# Altium PCB rascal-1.2.pcbdoc (part 1 of 3)
Units mm, origin at the board's own origin, x right, y up, seen from the top; angles counter-clockwise.
Board outline 114.3 x 53.34 mm, 4 copper layers (Top Layer, Ground Plane, Power Plane, Bottom Layer); 125 components, 215 nets, 799 pads, 468 vias.
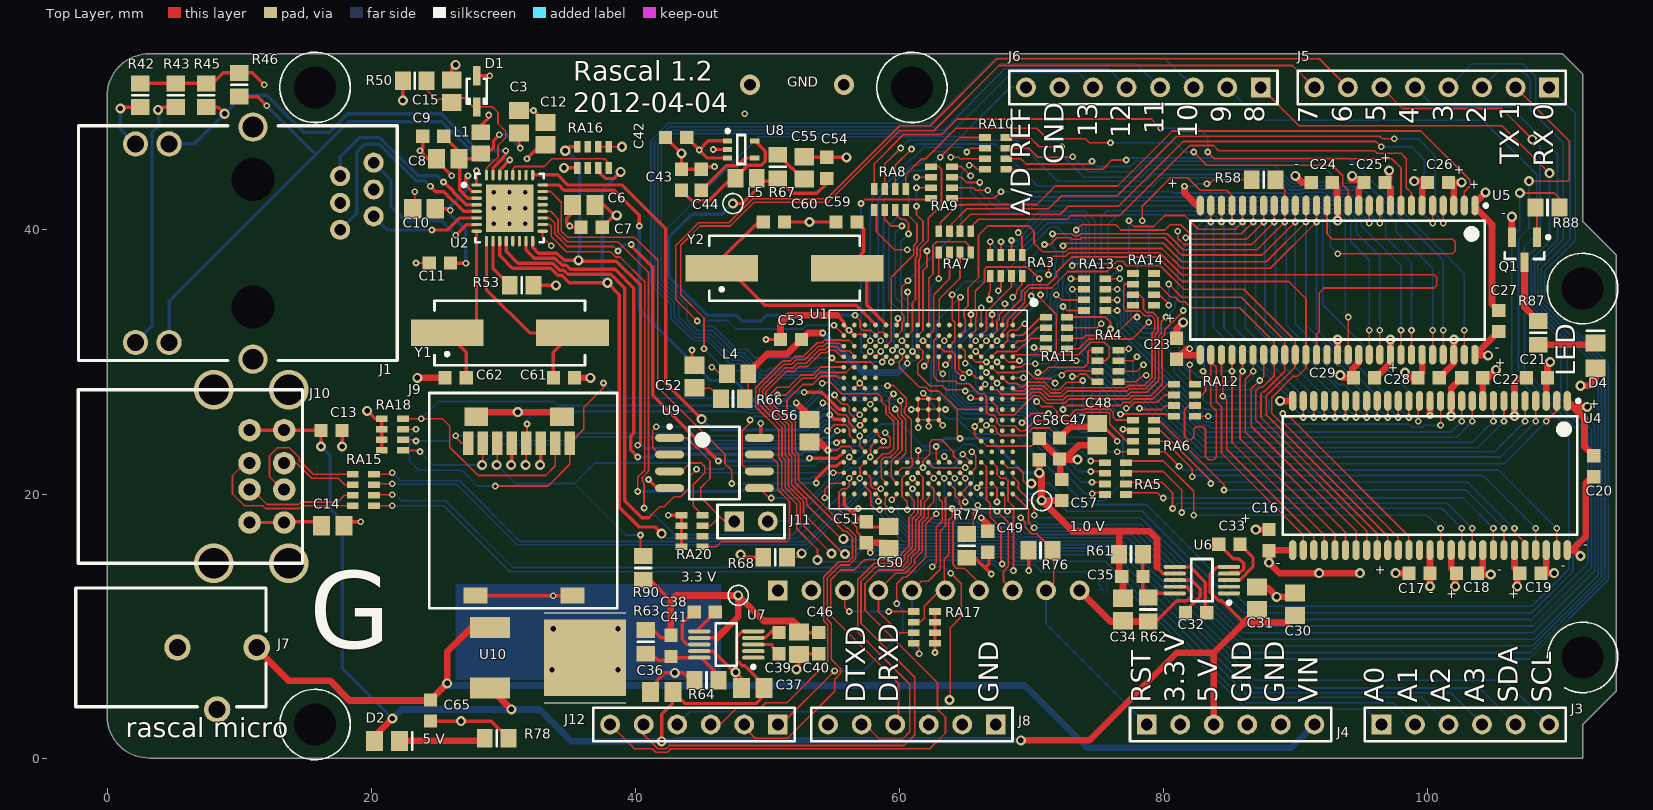
[diagram p0: Top Layer view]
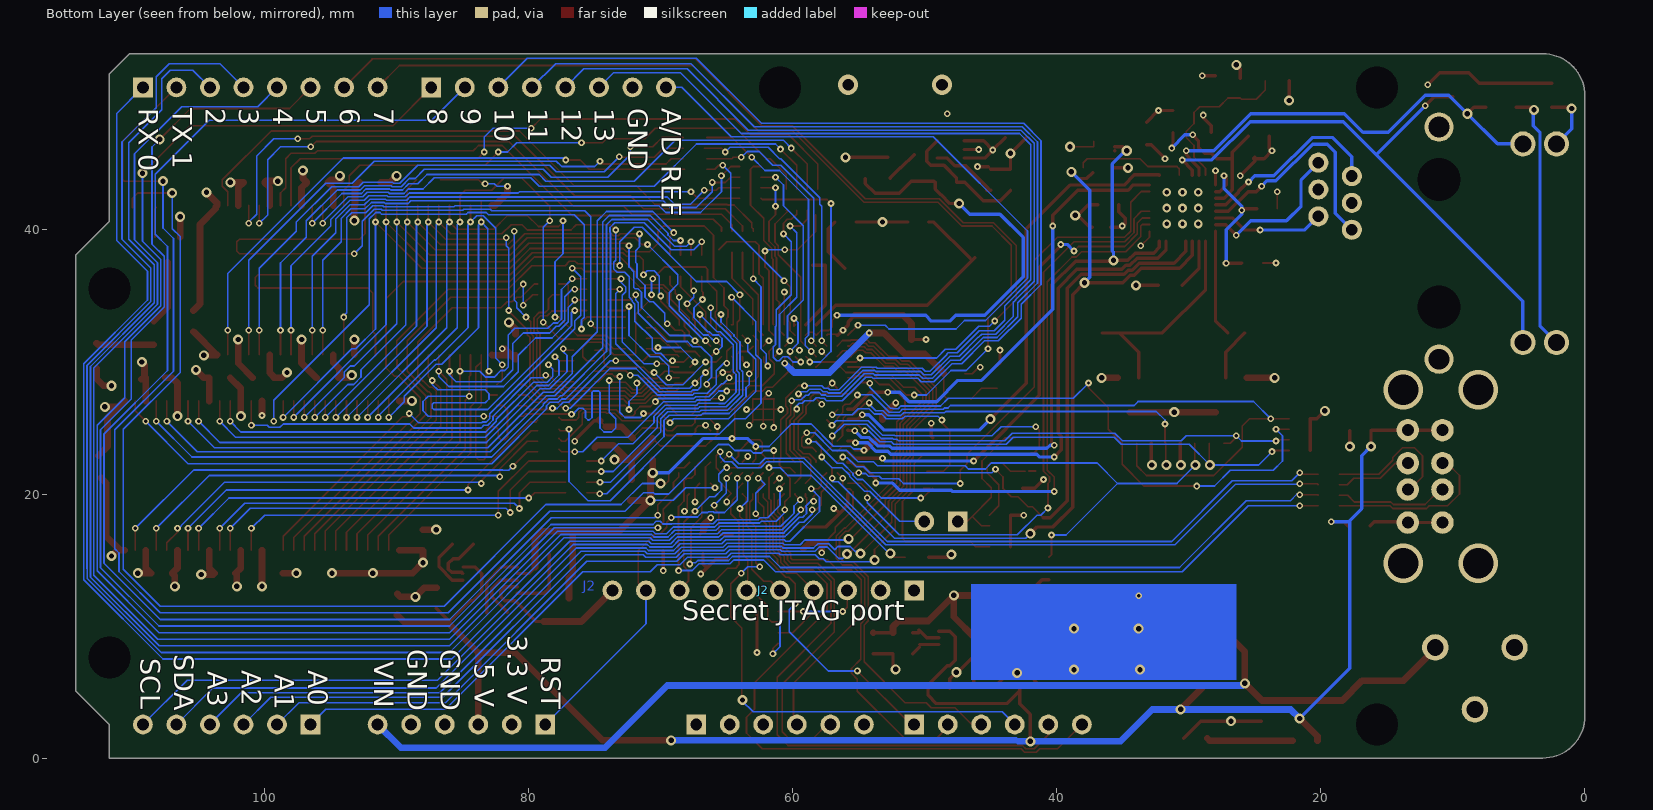
[diagram p1: Bottom Layer view, seen from below]
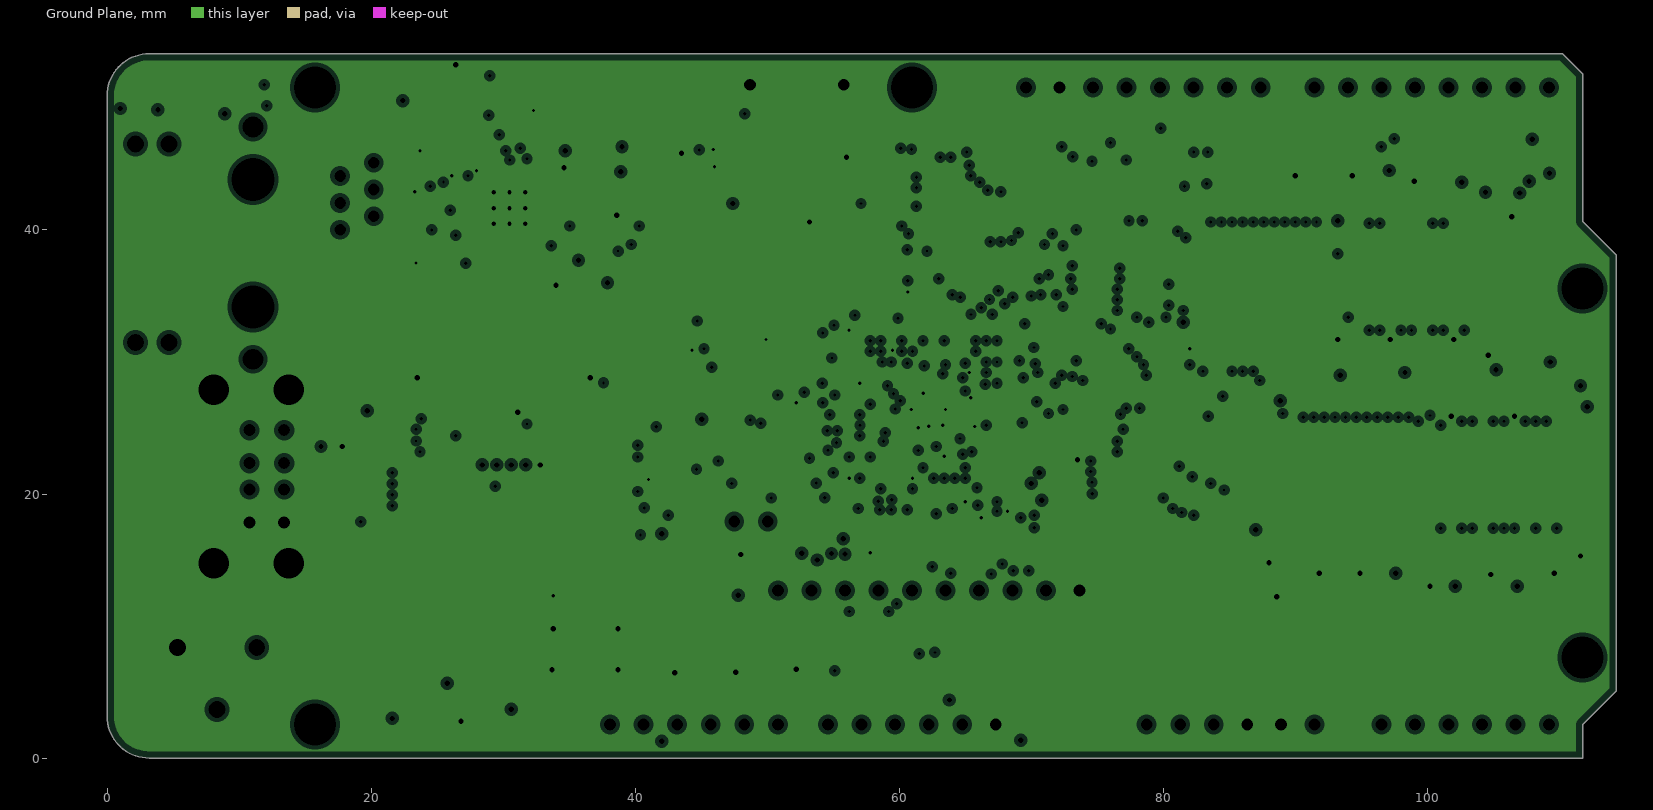
[diagram p2: Ground Plane, clearances drawn from the general rule]
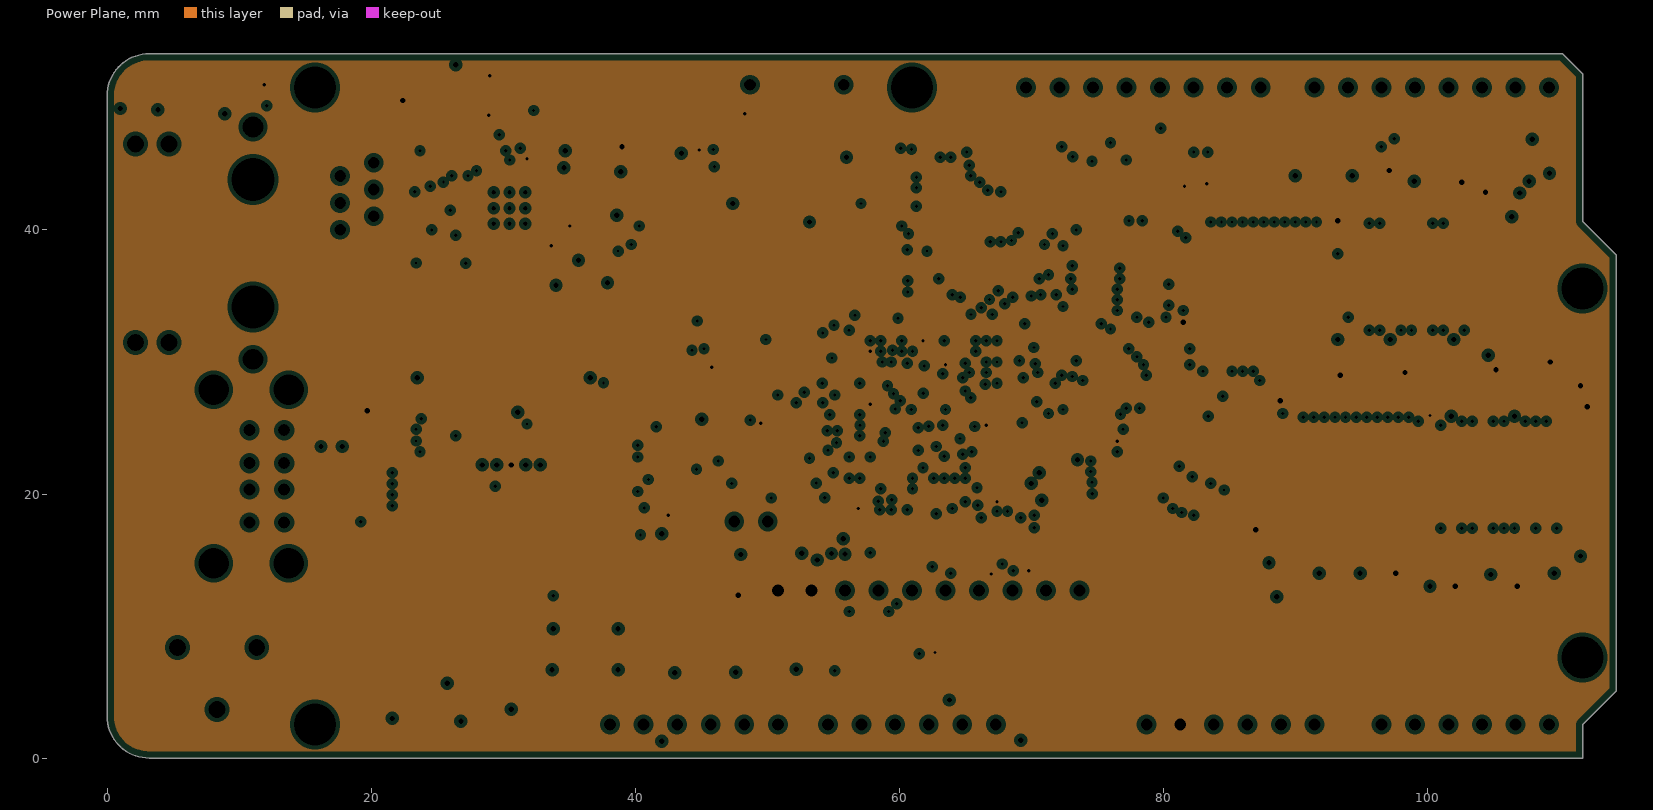
[diagram p3: Power Plane, clearances drawn from the general rule]

## Layer stack, top to bottom
Top Layer: signal copper 0.0356
Dielectric: core 0.32, FR-4, Dk 4.8
Ground Plane: plane copper 0.0356, net GND
Dielectric: prepreg 0.32, FR-4, Dk 4.8
Power Plane: plane copper 0.0356, net 3V3
Dielectric: core 0.32, FR-4, Dk 4.8
Bottom Layer: signal copper 0.0356

## Board outline
0,3.175 ccw(c3.175,3.175) 3.175,0 111.76,0 111.76,2.54 114.3,5.08 114.3,38.1 111.76,40.64 111.76,51.816 110.236,53.34 3.175,53.34 3.175,53.341 ccw(c3.175,50.166) 0,50.166

## Design rules (kind name [scope] priority, off if disabled: settings)
AssemblyTestPointUsage [All] p1: valid=2
AssemblyTestpoint [All] p1: testpointundercomponent=TRUE minsize=1.016 maxsize=2.54 preferedsize=1.524 minholesize=0 maxholesize=1.016 preferedholesize=0.813 testpointgrid=0.025 usegrid=FALSE gridtolerance=0 allowsidetop=TRUE allowsidebottom=TRUE
Clearance no-xtalk-for-memory [(InNetClass('Memory-signals')) vs (InNetClass('Memory-signals'))] p1: gap=0.127 // Preventing crosstalk between memory lines
Clearance "Clearance~Sunstone Circuits" [All] p2: gap=0.127 // Sunstone Circuits Minimum Clearance Rule (MLB~4&6 Layer Designs)
FabricationTestPointUsage [All] p1: valid=2 allowmultiple=FALSE
FabricationTestpoint [All] p1: side=3 testpointundercomponent=TRUE minsize=1.016 maxsize=2.54 preferedsize=1.524 minholesize=0 maxholesize=2.54 preferedholesize=0.813 testpointgrid=0.025 allowsidetop=TRUE allowsidebottom=TRUE usegrid=FALSE gridtolerance=0
HoleSize "HoleSize~Sunstone Circuits" [All] p1: absolutevalues=TRUE maxlimit=6.375 minlimit=0.102 maxpercent=80.000 minpercent=20.000 // Sunstone Circuits Hole Size Rule (MLB~4&6 Layer Designs)
HoleSize Testpoint [All] p2: absolutevalues=TRUE maxlimit=2.54 minlimit=0.025 maxpercent=80.000 minpercent=20.000
HoleSize TestPointUsage [All] p3: absolutevalues=TRUE maxlimit=2.54 minlimit=0.025 maxpercent=80.000 minpercent=20.000
MatchedLengths [InNetClass('U5-signals')] p1: tolerance=1 checknetsindiffpair=TRUE checkdiffpairvsdiffpair=TRUE checkothers=TRUE
MinimumAnnularRing "MinimumAnnularRing~Sunstone Circuits" [All] p1: minimumring=0.127 // Sunstone Circuits Minimum Annular Ring (MLB~4&6 Layer Designs)
MinimumSolderMaskSliver [All] p1: minsoldermaskwidth=0.102
PlaneClearance "PlaneClearance~Sunstone Circuits" [All] p1: clearance=0.305 // Sunstone Circuits Power Plane Clearance Rule (MLB~4&6 Layer Designs)
PlaneConnect "PlaneConnect~Sunstone Circuits" [All] p1: planeconnectstyle=Relief reliefexpansion=0.254 reliefentries=4 reliefconductorwidth=0.203 reliefairgap=0.254 // Sunstone Circuits Power Plane Connect Rule (MLB~4&6 Layer Designs)
PolygonConnect "PolygonConnect~Sunstone Circuits" [All] p1: connectstyle=Relief reliefconductorwidth=0.203 reliefentries=4 polygonreliefangle="90 Angle" // Sunstone Circuits Polygon Connect Style (MLB~4&6 Layer Designs)
RoomDefinition BGARoom [(InComponent('U1'))] p1: confinementstyle=ConfineIn formatcopy=TRUE lockcomponents=FALSE outline 70.9,18.669 54.483,18.669 54.483,35.4 70.9,35.4
RoutingVias "RoutingVias~Sunstone Circuits" [All] p1: holewidth=0.152 width=0.432 viastyle="Through Hole" minholewidth=0.152 minwidth=0.432 maxholewidth=0.508 maxwidth=1.016 // Sunstone Circuits Routing Vias Rule (MLB~4&6 Layer Designs)
ShortCircuit "ShortCircuit~Sunstone Circuits" [All] p1: allowed=FALSE // Sunstone Circuits Short Circuit Rule~Do Not Allow (MLB~4&6 Layer Designs)
SilkscreenOverComponentPads [All] p1: minsilkscreentomaskgap=0.127
SolderMaskExpansion SolderMaskExpansion_ViasUnderBGA [WithinRoom(BGARoom) And (IsVia)] p1: expansion=-0.279
SolderMaskExpansion [All] p2: expansion=0.064 // Sunstone Circuits Solder Mask Expansion Rule (MLB~4&6 Layer Designs)
SupplyNets "Schematic Supply Nets_7" [InNet('VIN')] p1: voltage=9.000
SupplyNets "Schematic Supply Nets_6" [InNet('5VDC')] p2: voltage=5.000
SupplyNets "Schematic Supply Nets_5" [InNet('3V3')] p3: voltage=3.300
SupplyNets "Schematic Supply Nets_4" [InNet('3V3OSC')] p4: voltage=3.300
SupplyNets "Schematic Supply Nets_3" [InNet('NetC3_1')] p5: voltage=3.300
SupplyNets "Schematic Supply Nets_2" [InNet('NetC10_1')] p6: voltage=1.200
SupplyNets "Schematic Supply Nets_1" [InNet('1V0')] p7: voltage=1.000
SupplyNets "Schematic Supply Nets" [InNet('1V0PLL')] p8: voltage=1.000
ViasUnderSMD "ViasUnderSMD~Sunstone Circuits" [All] p1: allowed=FALSE // Sunstone Circuits Vias Under SMD~Do Not Allow (MLB~4&6 Layer Designs)
Width "Width~Sunstone Circuits" [All] p1: maxlimit=2.54 minlimit=0.076 preferedwidth=0.127 // Sunstone Circuits Minimum Width Rule (MLB~4&6 Layer Designs)
18 further rules are at their usual default settings.

## Classes and differential pairs
component class "Room Definition 1": C16 C17 C18 C19 C21 C22 C23 C24 C25 C26 C27 C28 C29 C33 C35 C47 C48 C57 Q1 R58 R61 R87 R88 RA4 RA5 RA6 RA12 RA13 RA14 U4 U5 U6
component class "Components Class 1": C16 C21 C22 C27 C28 C29 C33 Q1 R87
net class Memory-signals: A0 A1 A2 A3 A4 A5 A6 A7 A8 A9 A10 A11 A13 A14 CAS CKE CLK CS D0 D1 D2 D3 D4 D5 D6 D7 D8 D9 D10 D11 D12 D13 D14 D15 D16 D17 D18 D19 D20 D21 D22 D23 D24 D25 D26 D27 D28 D29 D30 D31 DQMH1 DQMH2 NetRA3_1 NetRA3_2 NetRA3_3 NetRA3_4 NetRA4_1 NetRA4_2 NetRA4_3 NetRA4_4 NetRA5_1 NetRA5_2 NetRA5_3 NetRA5_4 NetRA6_1 NetRA6_2 NetRA6_3 NetRA6_4 NetRA7_1 NetRA7_2 NetRA7_3 NetRA7_4 NetRA8_1 NetRA8_2 NetRA8_3 NetRA8_4 NetRA9_1 NetRA9_2 NetRA9_3 NetRA9_4 NetRA10_1 NetRA10_2 NetRA10_3 NetRA10_4 NetRA11_1 NetRA11_2 NetRA11_3 NetRA11_4 NetRA12_1 NetRA12_2 NetRA12_3 NetRA12_4 NetRA13_1 NetRA13_2 NetRA13_3 NetRA13_4 NetRA14_2 NetRA14_3

## Components (designator, comment, footprint, x,y, rotation, side; value= is the part's Value field where it differs from the comment)
C3 "Cap" CAPC2012N 31.2,48.2 r90 top
C6 "Cap" CAPC2012N 36.1,41.9 r0 top
C7 "Cap" CAPC1608N 36.7,40.2 r0 top
C8 "Cap" CAPC2012N 25.8,45.4 r180 top
C9 "Cap" CAPC1608N 24.7,47.1 r180 top
C10 "Cap" CAPC2012N 24,41.6 r180 top
C11 "Cap" CAPC1608N 25.2,37.5 r180 top
C12 "Cap" CAPC2012N 33.2,47.3 r90 top
C13 "Cap" CAPC1608N 17,24.8 r180 top
C14 "Cap" CAPC2012N 17.1,17.6 r0 top
C15 "Cap" CAPC2012N 26.1,50.5 r90 top
C16 "Cap" CAPC1608N 88,16.5 r270 top
C17 "Cap" CAPC1608N 99.4,14 r0 top
C18 "Cap" CAPC1608N 103,14 r0 top
C19 "Cap" CAPC1608N 107.8,14 r0 top
C20 "Cap" CAPC1608N 112.6,22.1 r270 top
C21 "Cap" CAPC1608N 108.3,28.8 r180 top
C22 "Cap" CAPC1608N 103.4,28.8 r180 top
C23 "Cap" CAPC1608N 81,31 r270 top
C24 "Cap" CAPC1608N 92,43.6 r180 top
C25 "Cap" CAPC1608N 96,43.6 r180 top
C26 "Cap" CAPC1608N 100.8,43.6 r180 top
C27 "Cap" CAPC1608N 105.4,33.1 r270 top
C28 "Cap" CAPC1608N 100.1,28.8 r0 top
C29 "Cap" CAPC1608N 95.2,28.8 r0 top
C30 "Cap" CAPC2012N 89.963,11.649 r90 top
C31 "Cap" CAPC2012N 87.087,12.109 r90 top
C32 "Cap" CAPC1608N 82.487,11.009 r0 top
C33 "Cap" CAPC1608N 85,16.2 r180 top
C34 "Cap" CAPC2012N 76.952,11.248 r270 top
C35 "Cap" CAPC1608N 77.652,13.748 r0 top
C36 "Cap" CAPC2012N 42,5 r180 top
C37 "Cap" CAPC2012N 48.9,5.3 r180 top
C38 "Cap" CAPC1608N 45.267,11.059 r0 top
C39 "Cap" CAPC1608N 50.9,8.7 r90 top
C40 "Cap" CAPC2012N 52.4,8.7 r270 top
C41 "Cap" CAPC1608N 42.7,8.5 r270 top
C42 "Cap" CAPC1608N 43.1,47 r180 top
C43 "Cap" CAPC1608N 43.5,43.8 r90 top
C44 "Cap" CAPC1608N 45,43.8 r90 top
C46 "Cap" CAPC1608N 53.9,8.7 r270 top
C47 "Cap" CAPC1608N 72.131,23.446 r90 top
C48 "Cap" CAPC2012N 75,24.5 r90 top
C49 "Cap" CAPC1608N 66.7,16.385 r270 top
C50 "Cap" CAPC2012N 59.2,16.7 r90 top
C51 "Cap" CAPC1608N 57.5,17.1 r90 top
C52 "Cap" CAPC2012N 44.5,28.9 r270 top
C53 "Cap" CAPC1608N 51.8,31.7 r0 top
C54 "Cap" CAPC1608N 54.5,44.7 r270 top
C55 "Cap" CAPC2012N 52.8,44.7 r270 top
C56 "Cap" CAPC2012N 53.2,24.8 r270 top
C57 "Cap" CAPC1608N 72.3,20.3 r270 top
C58 "Cap" CAPC1608N 70.6,23.4 r270 top
C59 "Cap" CAPC1608N 56,40.6 r0 top
C60 "Cap" CAPC1608N 50.5,40.6 r180 top
C61 "Cap" CAPC1608N 34.6,28.8 r0 top
C62 "Cap" CAPC1608N 26.4,28.8 r180 top
C65 "Cap" CAPC1608N 24.5,3.6 r90 top
D1 "Diode 1N4148" SOD-323 28,50.5 r270 top
D2 "LED2" CD2012-0805 21.2,1.3 r0 top
D4 "LED" CD2012-0805 112.727,30.478 r90 top
J1 "L829-1X1T-91" "BEL L829-1X1T-91" 11.045,39 r90 top locked
J2 "ARM JTAG HEADER" HDR1X10 50.8,12.7 r0 bottom locked
J3 "ARDUINO_ANALOG_IN" HDR1X6 96.52,2.54 r0 top locked
J4 "ARDUINO_SHIELD_POWER" HDR1X6 78.74,2.54 r0 top locked
J5 "ARDUINO_DIGITAL_LOW_BYTE" HDR1X8 109.22,50.8 r180 top locked
J6 "ARDUINO_DIGITAL_HIGH_BYTE" HDR1X8 87.376,50.8 r180 top locked
J7 "Center-positive 2.1 mm power jack" PJ-102AH 11.328,8.382 r90 top locked
J8 "SERIAL DEBUG PORT" HDR1X6 67.31,2.54 r180 top
J9 "MICROSD_SOCKET" "JAE SJ107021" 31.2,12.3 r270 top locked
J10 "72309-8034BLF" 72309-8034BLF -2.2,21.336 r270 top locked
J11 "Serial flash CS enable" HDR1X2 47.498,17.928 r0 top
J12 "SSC PORT" HDR1X6 50.8,2.54 r180 top
L1 "Inductor" INDC2012L 28.3,46.6 r270 top
L4 "Inductor" INDC2012L 47.756,29.1 r0 top
L5 "Inductor" INDC2012L 48.4,43.9 r0 top
Q1 "2N3904" SOT23-3N 107.35,38.5 r270 top
R42 "Res3" RESC2012N 2.5,50.2 r90 top
R43 "Res3" RESC2012N 5.2,50.2 r90 top
R45 "Res3" RESC2012N 7.5,50.2 r90 top
R46 "Res3" RESC2012N 10,51 r90 top
R50 "Res3" RESC2012N 23.3,51.3 r180 top
R53 "Res3" RESC2012N 31.4,35.8 r0 top
R58 "Res3" RESC2012N 87.6,43.8 r0 top
R61 "Res3" RESC2012N 77.552,15.448 r0 top
R62 "Res3" RESC2012N 78.852,11.248 r270 top
R63 "Res3" RESC2012N 40.8,8.8 r270 top
R64 "Res3" RESC2012N 45.4,5.9 r180 top
R66 "Res3" RESC2012N 47.4,27.2 r180 top
R67 "Res3" RESC2012N 50.8,44.8 r90 top
R68 "Res3" RESC2012N 50.6,15.2 r0 top
R76 "Res3" RESC2012N 70.7,15.726 r0 top
R77 "Res3" RESC2012N 65.1,16.067 r90 top
R78 "Res3" RESC2012N 29.5,1.5 r0 top
R87 "Res3" RESC2012N 108.4,32.2 r90 top
R88 "Res3" RESC2012N 109.1,41.7 r180 top
R90 "Res3" RESC2012N 40.6,14.4 r90 top
RA3 "RESISTOR ARRAY" 742C083 68.1,37.3 r0 top
RA4 "RESISTOR ARRAY" 742C083 75.8,29.7 r270 top
RA5 "RESISTOR ARRAY" 742C083 76.384,21.159 r270 top
RA6 "RESISTOR ARRAY" 742C083 78.5,24.4 r270 top
RA7 "RESISTOR ARRAY" 742C083 64.2,39.1 r0 top
RA8 "RESISTOR ARRAY" 742C083 59.3,42.3 r0 top
RA9 "RESISTOR ARRAY" 742C083 63.2,43.6 r270 top
RA10 "RESISTOR ARRAY" 742C083 67.3,45.8 r270 top
RA11 "RESISTOR ARRAY" 742C083 71.9,32.2 r270 top
RA12 "RESISTOR ARRAY" 742C083 81.6,27.1 r270 top
RA13 "RESISTOR ARRAY" 742C083 74.8,35.1 r270 top
RA14 "RESISTOR ARRAY" 742C083 78.5,35.5 r270 top
RA15 "RESISTOR ARRAY" 742C083 19.4,20.3 r270 top
RA16 "RESISTOR ARRAY" 742C083 36.8,45.5 r180 top
RA17 "RESISTOR ARRAY" 742C083 61.9,9.9 r90 top
RA18 "RESISTOR ARRAY" 742C083 21.6,24.5 r270 top
RA20 "RESISTOR ARRAY" 742C083 44.3,17.2 r270 top
U1 "AT91SAM9G20B-CU" AT91SAM9G20-CU 62.2,26.4 r270 top locked
U2 "KSZ8051RNL" QFN50P500X500-32VBN 30.48,41.656 r0 top
U4 "MT48LCxxMxxA2x-xx" TSOP2-54_N 100.2,21.4 r270 top locked
U5 "MT48LCxxMxxA2x-xx" TSOP2-54_N 93.2,36.2 r270 top locked
U6 "TPS60500" TSSOP50P490-10AN 82.925,13.474 r180 top
U7 "TPS60500" TSSOP50P490-10AN 46.9,8.6 r180 top
U8 "TPS717xx" SOT353-5AN 48.022,46.094 r0 top
U9 "MX25L3205D" SOP127P780-8N 46,22.352 r0 top locked
U10 "Volt Reg" DPAK-3 29,7.6 r270 top
Y1 "XTAL" HC49/4H_SMX 30.5,32.2 r0 top
Y2 "18.432 MHz" HC49/4H_SMX 51.3,37.1 r0 top

## Footprints (in the part's own frame and the unit in brackets; to place one, negate y for a bottom-side part, rotate by r counter-clockwise, add the part's x,y. Pads: shape width x height; smd on the part's side, far side on the other; paste and mask are expansions set on the pad)
742C083 [mm] "Resistor array"
  rect 0.5x0.9 smd mask+0.025: 1(-1.2,-0.8) 2(-0.4,-0.8) 3(0.4,-0.8) 4(1.2,-0.8) 5(1.2,0.8) 6(0.4,0.8) 7(-0.4,0.8) 8(-1.2,0.8)
72309-8034BLF [mm] "USB doubler decker jack"
  round 1.7 hole 0.92: 1(-3.5,15.61) 2(-1,15.61) 3(1,15.61) 4(3.5,15.61) 5(-3.5,12.99) 6(-1,12.99) 7(1,12.99) 8(3.5,12.99)
  silkscreen extent -6.57,0 6.57,17, body extent -6.5,0 6.5,17, height 15.5
AT91SAM9G20-CU [mil] "217-ball, 15 x 15 mm LFBGA package, 0.8 mm pitch"
  round 14 smd mask-1.09: A1(-251.97,251.97) A2(-220.47,251.97) A3(-188.98,251.97) A4(-157.48,251.97) A5(-125.98,251.97) A6(-94.49,251.97) A7(-62.99,251.97) A8(-31.5,251.97) A9(0,251.97) A10(31.5,251.97) A11(62.99,251.97) A12(94.49,251.97) A13(125.98,251.97) A14(157.48,251.97) A15(188.98,251.97) A16(220.47,251.97) A17(251.97,251.97) B1(-251.97,220.47) B2(-220.47,220.47) B3(-188.98,220.47) B4(-157.48,220.47) B5(-125.98,220.47) B6(-94.49,220.47) B7(-62.99,220.47) B8(-31.5,220.47) B9(0,220.47) B10(31.5,220.47) B11(62.99,220.47) B12(94.49,220.47) B13(125.98,220.47) B14(157.48,220.47) B15(188.98,220.47) B16(220.47,220.47) B17(251.97,220.47) C1(-251.97,188.98) C2(-220.47,188.98) C3(-188.98,188.98) C4(-157.48,188.98) C5(-125.98,188.98) C6(-94.49,188.98) C7(-62.99,188.98) C8(-31.5,188.98) C9(0,188.98) C10(31.5,188.98) C11(62.99,188.98) C12(94.49,188.98) C13(125.98,188.98) C14(157.48,188.98) C15(188.98,188.98) C16(220.47,188.98) C17(251.97,188.98) D1(-251.97,157.48) D2(-220.47,157.48) D3(-188.98,157.48) D4(-157.48,157.48) D5(-125.98,157.48) D6(-94.49,157.48) D7(-62.99,157.48) D8(-31.5,157.48) D9(0,157.48) D10(31.5,157.48) D11(62.99,157.48) D12(94.49,157.48) D13(125.98,157.48) D14(157.48,157.48) D15(188.98,157.48) D16(220.47,157.48) D17(251.97,157.48) E1(-251.97,125.98) E2(-220.47,125.98) E3(-188.98,125.98) E4(-157.48,125.98) E14(157.48,125.98) E15(188.98,125.98) E16(220.47,125.98) E17(251.97,125.98) F1(-251.97,94.49) F2(-220.47,94.49) F3(-188.98,94.49) F4(-157.48,94.49) F14(157.48,94.49) F15(188.98,94.49) F16(220.47,94.49) F17(251.97,94.49) G1(-251.97,62.99) G2(-220.47,62.99) G3(-188.98,62.99) G4(-157.48,62.99) G14(157.48,62.99) G15(188.98,62.99) G16(220.47,62.99) G17(251.97,62.99) H1(-251.97,31.5) H2(-220.47,31.5) H3(-188.98,31.5) H4(-157.48,31.5) H8(-31.5,31.5) H9(0,31.5) H10(31.5,31.5) H14(157.48,31.5) H15(188.98,31.5) H16(220.47,31.5) H17(251.97,31.5) J1(-251.97,0) J2(-220.47,0) J3(-188.98,0) J4(-157.48,0) J8(-31.5,0) J9(0,0) J10(31.5,0) J14(157.48,0) J15(188.98,0) J16(220.47,0) J17(251.97,0) K1(-251.97,-31.5) K2(-220.47,-31.5) K3(-188.98,-31.5) K4(-157.48,-31.5) K8(-31.5,-31.5) K9(0,-31.5) K10(31.5,-31.5) K14(157.48,-31.5) K15(188.98,-31.5) K16(220.47,-31.5) K17(251.97,-31.5) L1(-251.97,-62.99) L2(-220.47,-62.99) L3(-188.98,-62.99) L4(-157.48,-62.99) L14(157.48,-62.99) L15(188.98,-62.99) L16(220.47,-62.99) L17(251.97,-62.99) M1(-251.97,-94.49) M2(-220.47,-94.49) M3(-188.98,-94.49) M4(-157.48,-94.49) M14(157.48,-94.49) M15(188.98,-94.49) M16(220.47,-94.49) M17(251.97,-94.49) N1(-251.97,-125.98) N2(-220.47,-125.98) N3(-188.98,-125.98) N4(-157.48,-125.98) N14(157.48,-125.98) N15(188.98,-125.98) N16(220.47,-125.98) N17(251.97,-125.98) P1(-251.97,-157.48) P2(-220.47,-157.48) P3(-188.98,-157.48) P4(-157.48,-157.48) P5(-125.98,-157.48) P6(-94.49,-157.48) P7(-62.99,-157.48) P8(-31.5,-157.48) P9(0,-157.48) P10(31.5,-157.48) P11(62.99,-157.48) P12(94.49,-157.48) P13(125.98,-157.48) P14(157.48,-157.48) P15(188.98,-157.48) P16(220.47,-157.48) P17(251.97,-157.48) R1(-251.97,-188.98) R2(-220.47,-188.98) R3(-188.98,-188.98) R4(-157.48,-188.98) R5(-125.98,-188.98) R6(-94.49,-188.98) R7(-62.99,-188.98) R8(-31.5,-188.98) R9(0,-188.98) R10(31.5,-188.98) R11(62.99,-188.98) R12(94.49,-188.98) R13(125.98,-188.98) R14(157.48,-188.98) R15(188.98,-188.98) R16(220.47,-188.98) R17(251.97,-188.98) T1(-251.97,-220.47) T2(-220.47,-220.47) T3(-188.98,-220.47) T4(-157.48,-220.47) T5(-125.98,-220.47) T6(-94.49,-220.47) T7(-62.99,-220.47) T8(-31.5,-220.47) T9(0,-220.47) T10(31.5,-220.47) T11(62.99,-220.47) T12(94.49,-220.47) T13(125.98,-220.47) T14(157.48,-220.47) T15(188.98,-220.47) T16(220.47,-220.47) T17(251.97,-220.47) U1(-251.97,-251.97) U2(-220.47,-251.97) U3(-188.98,-251.97) U4(-157.48,-251.97) U5(-125.98,-251.97) U6(-94.49,-251.97) U7(-62.99,-251.97) U8(-31.5,-251.97) U9(0,-251.97) U10(31.5,-251.97) U11(62.99,-251.97) U12(94.49,-251.97) U13(125.98,-251.97) U14(157.48,-251.97) U15(188.98,-251.97) U16(220.47,-251.97) U17(251.97,-251.97)
  silkscreen extent -323,-295 295,319, body extent -299,-299 299,299, height 55
"BEL L829-1X1T-91" [mil] "Bel L829-1X1T-91 RJ45 jack"
  round 60 hole 128: 0(190,0) 1(-190,0)
  round 87 hole 62: 2(346,0) 3(-346,0)
  round 60 hole 35: 4(40,-260) 5(120,-260) 6(200,-260) 10(80,-360) 11(160,-360) 12(240,-360)
  round 75 hole 50: 13(-296,250) 14(-296,350) 15(296,250) 16(296,350)
  silkscreen extent -350,-430 350,520, body extent -350,-435 350,525, height 453
CAPC1608N [mm] "Chip Capacitor, Body 1.6x0.8mm, IPC Medium Density"
  rect 1x1 smd: 1(-0.8,0) 2(0.8,0)
  body extent -0.87,-0.48 0.87,0.48, height 0.85
CAPC2012N [mm] "Chip Capacitor, Body 2.0x1.3mm, IPC Medium Density"
  rect 1.3x1.5 smd: 1(-0.85,0) 2(0.85,0)
  body extent -1.1,-0.72 1.1,0.72, height 1.1
CD2012-0805 [mm] "Chip Diode; Body 2.0 x 1.3 mm (LxW typ)"
  rect 1.3x1.5 smd: 1(-0.95,0) 2(0.95,0)
  silkscreen extent 1.9,-0.65 1.9,0.65
DPAK-3 [mm] "Case 369C-01 for MC78xx regulators"
  rect 1.6x3 smd: 1(-2.3,0) 3(2.3,0)
  rect 5.8x6.2 smd: 2(0,7.2)
  silkscreen extent -3.4,4.1 3.4,10.3, body extent -3.4,4.1 3.4,10.3, height 2.38
HC49/4H_SMX [mm] "Quartz Crystal, SM; Body 13.4 (inc. leads) x 4.9 mm (LxW max)"
  rect 5.5x2 smd: 1(-4.75,0) 2(4.75,0)
  silkscreen extent -5.7,-2.45 5.7,2.45
HDR1X2 [mm] "Connector; Header; 2 Position"
  rect 1.5x1.5 hole 0.9: 1(0,0)
  round 1.5 hole 0.9: 2(2.54,0)
  silkscreen extent -1.27,-1.27 3.81,1.27
HDR1X6 [mm]
  rect 1.5x1.5 hole 0.9: 1(0,0)
  round 1.5 hole 0.9: 2(2.54,0) 3(5.08,0) 4(7.62,0) 5(10.16,0) 6(12.7,0)
  silkscreen extent -1.27,-1.27 13.97,1.27, body extent -1.28,-1.27 13.98,1.26, height 8.5
HDR1X8 [mm]
  rect 1.5x1.5 hole 0.9: 1(0,0)
  round 1.5 hole 0.9: 2(2.54,0) 3(5.08,0) 4(7.62,0) 5(10.16,0) 6(12.7,0) 7(15.24,0) 8(17.78,0)
  silkscreen extent -1.27,-1.27 19.05,1.27, body extent -1.3,-1.3 19.04,1.25, height 8.5
HDR1X10 [mm] "Connector; Header; 10 Position"
  rect 1.5x1.5 hole 0.9: 1(0,0)
  round 1.5 hole 0.9: 2(2.54,0) 3(5.08,0) 4(7.62,0) 5(10.16,0) 6(12.7,0) 7(15.24,0) 8(17.78,0) 9(20.32,0) 10(22.86,0)
INDC2012L [mm] "Chip Inductor, Body 2.0x1.2mm, IPC High Density"
  rect 1.2x1.4 smd: 1(-0.8,0) 2(0.8,0)
  body extent -1.1,-0.7 1.1,0.7, height 0.55
"JAE SJ107021" [mm] "MicroSD card socket"
  rect 1.8x0.8 smd: 1(-11.55,-3.85) 2(-11.55,-2.75) 3(-11.55,-1.65) 4(-11.55,-0.55) 5(-11.55,0.55) 6(-11.55,1.65) 7(-11.55,2.75) 8(-11.55,3.85)
  rect 1.2x1.8 smd: 9(0,-3.3) 10(0,4.05)
  rect 1.4x1.8 smd: 11(-13.55,-3.25) 12(-13.55,3.25)
  silkscreen extent -15.35,-6.8 0.95,7.45, body extent -15.25,-6.75 1,7.5, height 2
PJ-102AH [mm] "Center positive 2.1 mm power jack"
  round 2 hole 1.27: 1(0,0) 2(0,6) 3(-4.7,3)
  silkscreen extent -4.5,-0.7 4.5,13.7, body extent -5.8,-0.7 4.5,13.7, height 11
QFN50P500X500-32VBN [mm] "32-Pin Plastic Quad Flat No-Lead 0.5 mm Pitch"
  oval 0.8x0.25 smd: 1(-2.5,1.75) 2(-2.5,1.25) 3(-2.5,0.75) 4(-2.5,0.25) 5(-2.5,-0.25) 6(-2.5,-0.75) 7(-2.5,-1.25) 8(-2.5,-1.75) 17(2.5,-1.75) 18(2.5,-1.25) 19(2.5,-0.75) 20(2.5,-0.25) 21(2.5,0.25) 22(2.5,0.75) 23(2.5,1.25) 24(2.5,1.75)
  oval 0.25x0.8 smd: 9(-1.75,-2.5) 10(-1.25,-2.5) 11(-0.75,-2.5) 12(-0.25,-2.5) 13(0.25,-2.5) 14(0.75,-2.5) 15(1.25,-2.5) 16(1.75,-2.5) 25(1.75,2.5) 26(1.25,2.5) 27(0.75,2.5) 28(0.25,2.5) 29(-0.25,2.5) 30(-0.75,2.5) 31(-1.25,2.5) 32(-1.75,2.5)
  rect 3.6x3.6 smd: 33(0,0)
  silkscreen extent -3.57,-2.6 2.6,2.6, body extent -2.58,-2.58 2.58,2.58, height 1
RESC2012N [mm] "Chip Resistor, Body 2.0x1.2mm, IPC Medium Density"
  rect 1.2x1.4 smd: 1(-0.9,0) 2(0.9,0)
  silkscreen extent 0,-0.6 0,0.6, body extent -1.07,-0.7 1.07,0.7, height 0.7
SOD-323 [mm] "SOD-323/SC-76; 2 Leads; Body 1.7 x 1.3 mm, (LxW)"
  rect 1.45x0.55 smd: 1(1.175,0) 2(-1.175,0)
  silkscreen extent -0.95,-0.75 0.95,0.75
SOP127P780-8N [mm] "SOP, 8-Leads, Body 5.3x5.3mm, Pitch 1.27mm, IPC Medium Density"
  oval 2.2x0.6 smd: 1(-3.4,1.905) 2(-3.4,0.635) 3(-3.4,-0.635) 4(-3.4,-1.905) 5(3.4,-1.905) 6(3.4,-0.635) 7(3.4,0.635) 8(3.4,1.905)
  silkscreen extent -3.52,-2.75 1.9,2.88, body extent -2.73,-2.75 2.73,2.75, height 2.03
SOT23-3N [mm] "SOT23, 3-Leads, Body 2.9x1.3mm, Pitch 0.95mm, Lead Span 2.5mm, IPC Medium Density"
  rect 1.5x0.6 smd: 1(-0.95,0.95) 2(-0.95,-0.95) 3(0.95,0)
  silkscreen extent -1.07,-1.5 0.7,1.93, body extent -0.7,-1.5 0.7,1.5, height 1.1
SOT353-5AN [mm] "SOT353, 5-Leads, Body 2x1.3mm, Pitch 0.65mm, Lead Span 2.1mm, IPC Medium Density"
  rect 0.7x0.4 smd: 1(-1.025,0.65) 2(-1.025,0) 3(-1.025,-0.65) 4(1.025,-0.65) 5(1.025,0.65)
  silkscreen extent -1.15,-1.1 0.3,1.52, body extent -0.7,-1.1 0.7,1.1, height 1.1
TSOP2-54_N [mm] "SOP, 54-Leads, Body 22.2x10.16mm, Pitch 0.8mm, IPC Medium Density"
  oval 1.5x0.55 smd: 1(-5.65,10.4) 2(-5.65,9.6) 3(-5.65,8.8) 4(-5.65,8) 5(-5.65,7.2) 6(-5.65,6.4) 7(-5.65,5.6) 8(-5.65,4.8) 9(-5.65,4) 10(-5.65,3.2) 11(-5.65,2.4) 12(-5.65,1.6) 13(-5.65,0.8) 14(-5.65,0) 15(-5.65,-0.8) 16(-5.65,-1.6) 17(-5.65,-2.4) 18(-5.65,-3.2) 19(-5.65,-4) 20(-5.65,-4.8) 21(-5.65,-5.6) 22(-5.65,-6.4) 23(-5.65,-7.2) 24(-5.65,-8) 25(-5.65,-8.8) 26(-5.65,-9.6) 27(-5.65,-10.4) 28(5.65,-10.4) 29(5.65,-9.6) 30(5.65,-8.8) 31(5.65,-8) 32(5.65,-7.2) 33(5.65,-6.4) 34(5.65,-5.6) 35(5.65,-4.8) 36(5.65,-4) 37(5.65,-3.2) 38(5.65,-2.4) 39(5.65,-1.6) 40(5.65,-0.8) 41(5.65,0) 42(5.65,0.8) 43(5.65,1.6) 44(5.65,2.4) 45(5.65,3.2) 46(5.65,4) 47(5.65,4.8) 48(5.65,5.6) 49(5.65,6.4) 50(5.65,7.2) 51(5.65,8) 52(5.65,8.8) 53(5.65,9.6) 54(5.65,10.4)
  silkscreen extent -5.77,-11.15 4.5,11.35, body extent -5.12,-11.15 5.12,11.15, height 1.2
TSSOP50P490-10AN [mm] "TSSOP, 10-Leads, Body 3x3mm, Pitch 0.5mm, IPC Medium Density"
  oval 1.7x0.3 smd: 1(-2.05,1) 2(-2.05,0.5) 3(-2.05,0) 4(-2.05,-0.5) 5(-2.05,-1) 6(2.05,-1) 7(2.05,-0.5) 8(2.05,0) 9(2.05,0.5) 10(2.05,1)
  silkscreen extent -2.17,-1.6 0.8,1.82, body extent -1.6,-1.6 1.6,1.6, height 1.1

## Part data
C3 C6 C7 C8 C9 C10 C11 C12 C13 C14 C15 C16 C17 C18 C19 C20 C21 C22 C23 C24 C25 C26 C27 C28 C29 C30 C31 C32 C33 C34 C35 C36 C37 C38 C39 C40 C41 C42 C43 C44 C46 C47 C48 C49 C50 C51 C52 C53 C54 C55 C56 C57 C58 C59 C60 C61 C62 C65: "Capacitor"
D1: "Diode"
D2: "Green LED"
D4: library part LED2, "Green LED"
J1: "RJ45 jack"
J2: "Secret JTAG port"
J3 J4: "6-pin socket"
J5 J6: "8-pin socket"
J7: library part PWR2.5, "Power jack"
J8 J12: library part ARDUINO_ANALOG_IN, "6-pin socket"
J9: "MicroSD card socket"
J10: "USB double decker jack"
J11: library part JUMPER, "2-pin jumper"
Q1: "NPN transistor"
R42 R43 R45 R46 R50 R53 R58 R61 R62 R63 R64 R66 R67 R68 R76 R77 R78 R87 R88 R90: "Resistor"
RA3 RA4 RA5 RA6 RA7 RA8 RA9 RA10 RA11 RA12 RA13 RA14 RA15 RA16 RA17 RA18 RA20: "Resistor array"
U1: "Microcontroller"
U2: "Ethernet transceiver"
U4 U5: "SDRAM"
U6 U7: "Step-down charge pump"
U8: "Low-dropout regulator"
U9: "Serial flash"
U10: library part "VOLT REG", "Voltage regulator"
Y1: "Crystal"
Y2: library part XTAL, "Crystal"

## Free pads (board coordinates)
  round 1.524 hole 3.175 unplated: NPTH(15.748,2.54) NPTH(15.748,50.8) NPTH(60.96,50.8) NPTH(111.76,7.62) NPTH(111.76,35.56)

## Via types
v1: diameter 0.508, hole 0.254, Top Layer to Bottom Layer, 360 vias
v2: diameter 0.762, hole 0.406, Top Layer to Bottom Layer, 93 vias
v3: diameter 0.66, hole 0.33, Top Layer to Bottom Layer, tented top, 9 vias
v4: diameter 3, hole 2.3, Top Layer to Bottom Layer, 4 vias
v5: diameter 1.524, hole 0.889, Top Layer to Bottom Layer, 2 vias

## Nets (pads, with @x,y where several pads share a name; then routed paths per layer and width w, separated by ;. In a path a pad name is that pad's centre, name@x,y a point inside that pad or via, vN(x,y) a via of type N, cw(c..) or ccw(c..) an arc to the next point about the centre after c; other vN are vias at no path point)
1V0: C34.1 C35.1 C56.2 C57.2 C58.2 R61.1 U1.D9 U1.D16 U1.H14 U1.M1 U1.T13 U6.7 | length 68.9
  Top Layer w0.127: C56.2@53.086,23.516 C56.2@53.086,23.95 ; v1@54.6,23.3 55.3,23.3 55.6,23.6 56.246,23.6 U1.T13@56.63,23.216 ; U1.M1@59.83,32.816 59.789,32.816 59.9,32.705 v1(59.9,33.3) v1@59.9,33.5 ; v1@60.236,30.818 60.236,30.557 60.232,30.553 60.232,30.247 60,30.016 60,29.6 61.525,28.075 62,28.075 62.275,27.8 63,27.8 64.384,26.416 ; v1(62.8,23.6) 62.8,22.646 U1.H14@63.03,22.416 ; v1(64.6,24.2) 64.384,24.416 64.384,26.416 ; v1(65.888,20.468) 66.23,20.81 U1.D16@66.23,20.816 ; U1.D9@66.23,26.416 64.384,26.416
  Top Layer w0.254: v2(70.6,21.607) v2@70.778,21.429 ; 79.515,14.448 79.989,13.974 U6.7@80.875,13.974
  Top Layer w0.508: C56.2@53.2,23.95 53.95,23.95 v1@54.6,23.3 ; v2(70.6,21.607) C58.2@70.6,22.6 ; v2@70.778,21.429 v2(70.778,19.522) v2@70.8,19.5 ; C57.2@72.3,19.5 v2@70.8,19.5 ; C34.1@76.952,12.098 76.952,13.648 C35.1@76.852,13.748 76.652,13.948 R61.1@76.652,15.448 76.652,17.186 ; 79.515,14.448 79.515,16.585 78.914,17.186 76.652,17.186 ; v2@70.8,19.5 73.114,17.186 76.652,17.186
  Bottom Layer w0.127: v1@54.6,23.3 54.715,23.415 55.415,23.415 55.618,23.618 56.918,23.618 58.6,25.3 60.1,25.3 61.8,23.6 v1(62.8,23.6) ; v1(59.9,33.3) 59.6,33 59.6,31.414 v1@60.207,30.807 ; v1(65.888,20.468) 68.093,20.468 69.039,19.522 v2(70.778,19.522)
  Bottom Layer w0.254: v1(62.8,23.6) 63.4,24.2 v1(64.6,24.2) 66.8,24.2 69.393,21.607 v2(70.6,21.607)
  other v1: 54.6,23.313 60.2,30.8
1V0PLL: C54.2 L5.2 R67.1 U1.N2 U1.P2 | length 37.1
  Top Layer w0.127: v1(56.642,33.528) 57.023,33.147 57.023,32.639 57.277,32.385 57.861,32.385 58.23,32.016 58.472,32.258 58.788,32.258 U1.N2@59.03,32.016
  Top Layer w0.254: v2(47.4,42) 48.092,42 48.763,42.671 48.772,42.671 49.2,43.1 L5.2@49.2,43.6 ; L5.2@49.33,43.681 51.019,43.681 51.919,42.781 53.766,42.781 54.5,43.515 C54.2@54.5,43.9
  Bottom Layer w0.254: v2(47.4,42) 46.6,41.2 44.3,41.2 42.534,39.434 42.534,36.462 45.468,33.528 47.665,33.528 48.093,33.1 49.5,33.1 49.928,33.528 v1(56.642,33.528)
3V3: C6.1 C7.1 C12.1 C16.1 C17.1 C18.1 C19.1 C20.1 C21.1 C22.1 C23.1 C24.1 C25.1 C26.1 C27.1 C28.1 C29.1 C40.1 C41.1 C42.1 C46.1 C47.2 C48.2 C49.2 C50.2 C51.2 D1.2 D4.1 J2.1 J2.2 J4.2 J9.4 L1.1 L4.1 R42.2 R43.2 R45.2 R46.2 R50.2 R58.1 R63.1 R76.1 R77.1 R90.1 RA16.1 RA16.2 RA17.1 RA17.2 RA17.3 RA17.4 RA18.1 RA18.2 RA18.3 RA18.4 RA20.1 RA20.2 RA20.3 RA20.4 U1.C16 U1.D11 U1.G4 U1.J3 U1.P8 U1.R4 U1.U17 U2.17 U4.1 U4.3 U4.9 U4.14 U4.27 U4.43 U4.49 U5.1 U5.3 U5.9 U5.14 U5.27 U5.43 U5.49 U7.7 U8.1 U8.3 U9.8 | length 154
  Top Layer w0.127: U2.17@32.98,39.906 32.98,39.45 v1(33.63,38.8) ; RA16.2@37.2,46.7 RA16.2@37.2,46.3 RA16.1@38,46.3 v2(39,46.3) ; v1(45.8,29.6) 45.9,29.6 46.4,29.1 L4.1@46.956,29.1 ; U1.R4@57.43,30.416 57.8,30.786 v1(57.8,30.8) ; v1@57.847,26.833 U1.P8@58.23,27.216 ; v1(61.8,31.6) 61.846,31.6 U1.J3@62.23,31.216 ; v1(63.5,29.8) 63.8,30.1 63.8,30.386 U1.G4@63.83,30.416 ; U1.D11@66.23,24.816 66.605,25.195 v1@66.61,25.2 ; U1.C16@67.03,20.816 67.4,20.446 v1(67.4,19.4) ; C47.2@72.131,24.246 71.381,24.996 70.096,24.996 69.532,24.432 67.647,24.432 67.368,24.711 67.368,24.953 67.153,25.168 66.847,25.168 66.745,25.065 v1@66.61,25.2 ; 74.15,25.1 C48.2@74.6,25.55 ; v1@83.5,43.5 83.8,43.8 R58.1@86.7,43.8 ; v1@66.61,25.2 v1(66.6,25.2) 66.62,25.21 v1@66.61,25.2
  Top Layer w0.254: R42.2@2.5,51.1 R43.2@5.2,51.1 R45.2@7.5,51.1 ; R45.2@7.5,51.1 8,51.1 8.8,51.9 R46.2@10,51.9 11,51.9 v1(11.9,51) ; v2(19.7,26.3) 20.3,25.7 RA18.1@20.8,25.7 RA18.2@20.8,24.9 RA18.3@20.8,24.1 RA18.4@20.8,23.3 ; v2(22.4,49.8) R50.2@22.4,51.3 ; D1.2@28,51.675 v1(28.975,51.675) ; L1.1@28.3,47.4 28.3,47.9 28.9,48.5 v1(28.9,48.7) ; v2@30.6,22.4 30.65,22.45 J9.4@30.65,23.85 ; v1(31.8,45.4) 32.85,46.45 C12.1@33.2,46.45 ; C6.1@35.3,41.9 35.3,41.374 34.8,40.874 34.8,40.45 35.05,40.2 C7.1@35.9,40.2 ; R90.1@40.6,13.5 41.119,13.5 42.7,11.919 ; R63.1@40.8,9.7 41.35,9.7 41.95,9.1 C41.1@42.7,9.1 ; v1(42.5,18.4) RA20.1@43.5,18.4 RA20.2@43.5,17.6 RA20.3@43.5,16.8 RA20.4@43.5,16 ; C42.1@43.9,47 v1(44.839,46.061) v1@44.85,46.05 ; U7.7@44.85,9.1 46.2,9.1 ; U8.3@46.997,45.444 45.456,45.444 v1@44.85,46.05 ; U8.1@46.997,46.744 45.544,46.744 v1@44.85,46.05 ; U9.8@49.4,24.257 49.5,24.357 v1(49.5,25.352) ; C40.1@52.4,9.5 C46.1@53.9,9.5 ; U1.U17@55.83,20.016 55.83,19.17 56.45,18.55 ; v1(56.9,18.9) 56.8,18.9 56.45,18.55 ; C50.2@59.2,17.5 57.5,17.5 56.45,18.55 ; v1@62.7,8.2 v1(62.7,8) RA17.1@62.7,8.7 RA17.2@62.7,9.5 RA17.3@62.7,10.3 RA17.4@62.7,11.1 ; R77.1@65,15.1 65.8,15.1 66.492,14.408 ; C49.2@66.8,15.486 66.8,14.716 66.492,14.408 ; v1(66.96,13.94) 66.492,14.408 ; v1(69.8,14.2) 69.8,14.3 R76.1@69.8,15.726 ; C48.2@74.6,25.55 75.05,25.55 76.4,24.2 v1@76.4,24
  Top Layer w0.508: C41.1@42.7,9.1 42.7,11.919 43.1,12.319 v2(47.8,12.319) ; 46.2,9.1 47.8,10.7 v2(47.8,12.319) ; C40.1@52.4,9.5 52.4,9.95 51.969,10.381 49.738,10.381 v2(47.8,12.319) ; C47.2@72.131,24.246 72.985,25.1 74.15,25.1 ; C48.2@74.6,25.55 C48.2@74.65,25.6 ; C23.1@81,32.1 81,32.5 v2(81.5,33) ; v1(81.6,43.3) 81.6,42.8 82.55,41.85 U5.27@82.8,41.85 ; v2(87,17.3) C16.1@88,17.3 ; v2(88.85,27.05) U4.27@89.8,27.05 ; C24.1@92.8,43.6 93.156,43.244 93.156,41.894 U5.14@93.2,41.85 v2(93.2,40.7) ; v2(93.4,29) 93.6,28.8 C29.1@94.4,28.8 ; C29.1@94.325,28.8 94.325,29.472 94.8,29.947 U5.43@94.8,30.55 ; v2(97.1,44.5) 97.1,43.9 C25.1@96.8,43.6 97.2,43.2 U5.9@97.2,41.85 ; v2(97.6,14) C17.1@98.6,14 ; v2(98.3,29.2) 98.7,28.8 C28.1@99.225,28.8 ; C28.1@99.3,28.8 C28.1@99.225,28.8 ; U5.49@99.6,30.55 99.6,29.175 C28.1@99.225,28.8 ; v1(100.2,25.95) U4.14@100.2,27.05 ; U4.43@101.8,15.75 101.8,14.4 C18.1@102.2,14 102.1,13.9 v2(102.1,13) ; U5.3@102,41.85 102,43.2 C26.1@101.6,43.6 v2(102.6,43.6) ; U4.9@104.2,27.05 C22.1@104.2,28.8 104.6,28.8 v2(105.2,29.4) ; v2(104.4,42.85) 103.6,42.05 U5.1@103.6,41.85 103.7,41.75 103.7,41.614 104.9,40.414 104.9,34.4 C27.1@105.4,33.9 ; U4.49@106.6,15.75 106.6,14.4 C19.1@107,14 106.8,13.8 v2(106.8,13) ; U4.3@109,27.05 C21.1@109,28.8 ; C21.1@109.1,28.7 C21.1@109.35,28.7 ; C21.1@109.1,28.8 109.1,29.8 v2(109.3,30) ; U4.1@110.6,27.05 111.9,25.75 111.9,23.6 C20.1@112.6,22.9 ; 111.1,26.6 v2(112.1,26.6) ; v2(111.6,28.2) 112.2,28.2 112.727,28.727 D4.1@112.727,29.528
  Bottom Layer w0.127: v1(81.6,43.3) 82.4,43.3 82.6,43.5 v1(83.3,43.5)
  other v1: 76.5,24 57.8,26.8 35.05,40.3 48.3,48.8
  other v2: 30.6,22.2
3V3OSC: C53.2 L4.2 R66.1 U1.L4 | length 17.5
  Top Layer w0.127: R66.1@48.3,27.2 48.556,27.456 L4.2@48.556,29.1 ; U1.L4@60.6,30.4 60.6,29.951 60.625,29.926 v1@60.706,29.845
  Top Layer w0.508: L4.2@48.556,29.1 48.556,29.156 50,30.6 51.5,30.6 C53.2@52.6,31.7 53.1,32.2 v1(54.2,32.2)
  Bottom Layer w0.508: v1(54.2,32.2) 57.2,29.2 59.9,29.2 v1(60.6,29.9)
5VDC: C13.2 C14.2 C30.1 C31.1 C36.1 C37.1 D2.1 J4.3 J10.1 J10.5 U6.5 U7.5 U10.3 | length 143.2
  Top Layer w0.254: J10.5@10.79,24.836 J10.1@13.41,24.836 16.164,24.836 C13.2@16.2,24.8 v2(16.2,23.6) v2@16.2,23.4 ; C14.2@17.95,17.6 18.25,17.9 v1(19.2,17.9) ; v2(42,1.27) 42,3.3 42.8,4.1 C36.1@42.8,5.1 ; C36.1@42.8,5.4 C36.1@42.8,5.1 ; C36.1@43.35,4.55 C36.1@42.875,5.025 ; U7.5@48.95,9.6 48.1,9.6 47.7,9.2 47.7,7.4 48.1,7 48.3,7 49.7,5.6 C37.1@49.7,5.3 ; C37.1@49.75,5.3 49.75,4.75 49.127,4.127 43.773,4.127 C36.1@42.875,5.025 ; U6.5@84.975,14.474 84.077,14.474 83.56,13.956 83.56,12.559 84.195,11.924 84.428,11.924 86.1,10.252 ; 86.1,10.422 C31.1@87.012,11.334 ; C36.1@42.8,5.1 C36.1@42.875,5.025
  Top Layer w0.508: D2.1@20.25,1.3 20.25,1.65 v2(21.6,3) ; U10.3@29,5.3 v2(30.617,3.683) ; v2(69.214,1.344) 74.388,1.344 81.017,7.973 83.82,7.973 ; J4.3@83.82,2.54 83.82,7.973 ; C30.1@89.988,10.824 89.963,10.849 89.366,10.252 86.1,10.252 83.82,7.973
  Bottom Layer w0.254: v2(16.2,23.6) 16.9,22.9 16.9,18.9 17.9,17.9 ; v1(19.2,17.9) 17.9,17.9 ; v2(21.6,3) 17.8,6.8 17.8,17.9 17.9,17.9
  Bottom Layer w0.508: v2(21.6,3) 22.283,3.683 v2(30.617,3.683) 32.766,3.683 35.179,1.27 v2(42,1.27) 42.9,1.27 ; 43.101,1.344 v2(69.214,1.344)
A0: RA11.8 U4.15 | length 48.8
  Top Layer w0.127: RA11.8@72.7,33.4 75.6,33.4 76,33 v1(76,32.5) ; v1(99.3,25.5) U4.15@99.3,27.05
  Bottom Layer w0.127: v1(76,32.5) 76,33.2 75.8,33.4 75.8,40.4 76.545,41.144 83.044,41.144 83.22,41.32 84.6,41.32 84.72,41.2 91.141,41.2 91.261,41.32 91.594,41.32 92.07,40.844 92.07,34.33 99.3,27.1 v1(99.3,25.5)
A1: RA11.7 U5.15 | length 53.3
  Top Layer w0.127: RA11.7@72.7,32.6 75,32.6 v1(75.3,32.9) ; U5.15@92.4,41.85 92.4,39.7 92.8,39.3 101.9,39.3 102.1,39.1 102.1,38.4 101.9,38.2 v1(93.2,38.2)
  Bottom Layer w0.127: v1(75.3,32.9) 75.3,41 75.754,41.454 82.799,41.454 82.919,41.574 84.926,41.574 85.004,41.497 91.078,41.497 91.156,41.574 91.699,41.574 92.606,40.668 92.606,38.794 v1(93.2,38.2)
A2: RA11.6 U4.23 U5.23 | length 43.6
  Top Layer w0.127: RA11.6@72.7,31.8 73.9,31.8 74.1,32 76.3,32 77.7,33.4 v1(78,33.4) ; v1(77.4,40.7) 77.4,40.6 77.745,40.255 79.256,40.255 80.1,41.1 81.6,41.1 82.646,40.054 85.454,40.054 v1(86,40.6) U5.23@86,41.85 ; v1(93,25.8) U4.23@93,27.05
  Bottom Layer w0.127: v1(77.4,40.7) 77.4,38.2 78,37.6 v1(78,33.4) ; v1(86,40.6) 86.2,40.4 86.2,32.6 v1(93,25.8)
A3: RA11.5 U4.24 U5.24 | length 45.3
  Top Layer w0.127: RA11.5@72.7,31 73.6,31 74.346,31.746 77.646,31.746 v1(78.9,33) ; v1(78.4,40.7) 78.4,41.8 80.544,43.944 81.856,43.944 82.8,43 84.8,43 85.2,42.6 v1(85.2,40.6) ; v1(92.2,25.8) U4.24@92.2,27.05
  Bottom Layer w0.127: v1(78.4,40.7) 78.9,40.2 v1(78.9,33) ; v1(85.2,40.6) 85.4,40.4 85.4,32.6 92.041,25.959 92.2,25.959 v1(92.2,25.8)
A4: RA12.8 U4.25 U5.25 | length 35
  Top Layer w0.127: v1@82.1,29.8 82,29.7 82,28.7 RA12.8@82.4,28.3 ; v1(84.4,40.6) U5.25@84.4,41.85 ; v1(91.4,25.8) U4.25@91.4,27.05
  Bottom Layer w0.127: v1(82,29.8) 82.5,30.3 82.5,40.129 83.437,41.066 83.934,41.066 v1(84.4,40.6) 84.6,40.4 84.6,32.6 87.049,30.151 87.152,30.151 91.4,25.903 v1(91.4,25.8)
A5: RA12.7 U4.26 U5.26 | length 35
  Top Layer w0.127: RA12.7@82.4,27.5 82.9,27.5 83.2,27.8 83.2,29.1 v1@83.1,29.2 ; v1(83.6,40.6) U5.26@83.6,41.85 U5.26@83.6,42.2 ; v1(90.6,25.8) U4.26@90.6,27.4
  Bottom Layer w0.127: v1@83.1,29.3 83.1,40.1 v1(83.6,40.6) 83.8,40.4 83.8,32.6 86.582,29.818 86.584,29.821 87.016,29.821 89.422,27.415 89.422,26.978 v1(90.6,25.8)
  other v1: 83,29.3
A6: RA12.6 U4.29 U5.29 | length 33.7
  Top Layer w0.127: RA12.6@82.4,26.7 81.922,26.7 81.6,26.378 81.6,24.3 81.8,24.1 82.1,24.1 82.3,24.3 82.3,24.9 82.5,25.1 83,25.1 83.2,24.9 83.2,22.8 83.4,22.6 83.8,22.6 84,22.8 84,26.3 83.6,26.7 U5.29@83.6,30 ; U5.29@83.6,30.55 U5.29@83.6,30 ; U4.29@90.6,15.75 90.6,16.9 84.4,23.1 84.4,26.6 84,27 84,29.6 U5.29@83.6,30
A7: RA12.5 U4.30 U5.30 | length 27.8
  Top Layer w0.127: RA12.5@82.4,25.9 v1(83.4,25.9) ; U5.30@84.4,30.55 84.4,29 84.5,28.9 v1(84.5,27.4) 84.8,27.1 84.8,23.4 91.4,16.8 U4.30@91.4,15.75
  Bottom Layer w0.127: v1(83.4,25.9) 87.6,25.9 88,26.3 88,27 87.6,27.4 v1(84.5,27.4)
A8: RA13.8 U4.31 U5.31 | length 33.3
  Top Layer w0.127: RA13.8@75.6,36.3 76.6,36.3 v1@76.65,36.25 ; U5.31@85.2,30.55 v1(85.2,29.3) 85.2,23.9 92.2,16.9 U4.31@92.2,15.75
  Bottom Layer w0.127: v1(76.7,36.3) 77.516,35.484 77.516,33.255 77.816,32.955 78.145,32.955 78.545,32.556 81.044,32.556 81.556,32.044 81.556,29.616 81.816,29.355 82.11,29.355 82.61,28.855 83.256,28.855 83.7,29.3 v1(85.2,29.3)
A9: RA13.7 U4.32 U5.32 | length 33.9
  Top Layer w0.127: RA13.7@75.6,35.5 v1(76.5,35.5) v1@76.6,35.5 ; U5.32@86,30.55 v1(86,29.3) 86,29.2 85.8,29 85.8,24.2 93,17 U4.32@93,15.75
  Bottom Layer w0.127: v1@76.65,35.55 77.262,34.938 77.262,33.15 77.711,32.701 77.899,32.701 78.4,32.2 80.4,32.2 81.2,31.4 81.2,29.4 82.098,28.502 85.501,28.502 86,29 v1(86,29.3)
A10: RA13.6 U4.33 U5.33 | length 34.3
  Top Layer w0.127: RA13.6@75.6,34.7 v1(76.5,34.7) v1@76.6,34.7 ; U5.33@86.8,30.55 v1(86.8,29.3) 86.2,28.7 86.2,24.7 93.8,17.1 U4.33@93.8,15.75
  Bottom Layer w0.127: v1@76.6,34.7 76.6,34.529 77.008,34.121 77.008,33.045 78.233,31.82 79.48,31.82 80.8,30.5 80.8,29.253 81.907,28.146 86.046,28.146 86.8,28.9 v1(86.8,29.3)
A11: RA13.5 U4.34 U5.34 | length 44
  Top Layer w0.127: RA13.5@75.6,33.9 v1(76.5,33.9) ; v1@87.25,28.65 87.35,28.65 87.6,28.9 U5.34@87.6,30.55 ; v1(87.3,28.6) 86.667,27.967 86.667,25.133 94.6,17.2 U4.34@94.6,15.75
  Bottom Layer w0.127: v1(76.5,33.9) 76.6,33.9 76.754,33.746 76.754,32.746 83.1,26.4 87.2,26.4 87.3,26.5 87.3,26.8 87.2,26.9 83.3,26.9 83,27.2 83,27.6 83.292,27.892 86.892,27.892 87.3,28.3 v1(87.3,28.6)
A12: U1.B4 U4.22 U5.22 | length 48.8
  Top Layer w0.127: U1.B4@67.83,30.416 68.246,30 68.9,30 69,30.1 v1(69.1,30.1) ; v1(73.4,40) 73.8,40.4 76.4,40.4 76.799,40.001 80.101,40.001 80.5,40.4 81.329,40.4 82.029,39.7 85.9,39.7 v1(86.8,40.6) U5.22@86.8,41.85 ; v1(93.8,25.8) U4.22@93.8,27.05
  Bottom Layer w0.127: v1(69.1,30.1) 69.441,30.1 69.996,30.655 70.384,30.655 70.644,30.916 70.644,31.785 71.955,33.096 71.955,34.384 72.154,34.583 72.154,34.654 72.393,34.893 72.393,36.467 72.726,36.8 73.3,36.8 73.545,37.045 73.545,37.556 73.4,37.7 v1(73.4,40) ; v1(86.8,40.6) 87,40.4 87,32.6 v1(93.8,25.8)
A13: RA14.7 U4.35 U5.35 | length 30.9
  Top Layer w0.127: RA14.7@79.3,35.9 79.577,35.9 80.577,34.9 80.9,34.9 81.2,34.6 81.233,34.6 81.263,34.57 81.63,34.57 82.1,34.1 85.8,34.1 88.4,31.5 U5.35@88.4,30.55 88.4,28.964 87.516,28.079 87.279,28.079 87,27.8 87,25.6 95.4,17.2 U4.35@95.4,15.75
A14: RA14.6 U4.36 U5.36 | length 34.3
  Top Layer w0.127: RA14.6@79.3,35.1 79.7,35.1 80.4,34.4 v1(80.4,34.3) ; v1@80.5,36 v1(80.4,35.9) 81.4,34.9 85.9,34.9 89.2,31.6 U5.36@89.2,30.55 89.2,29.297 87.652,27.749 87.549,27.749 87.4,27.6 87.4,25.8 96.2,17 U4.36@96.2,15.75
  Bottom Layer w0.127: v1(80.4,34.3) v1(80.4,35.9) v1@80.5,36
BA0: U1.A8 U4.20 U5.20 | length 52.9
  Top Layer w0.127: U1.A8@68.63,27.216 68.668,27.254 69.595,27.254 70.039,27.698 70.689,27.698 71.25,27.138 72.42,27.138 72.734,27.453 77.275,27.453 77.529,27.707 78.754,27.707 79.653,28.605 79.653,29.395 79.646,29.401 79.646,31.968 79.852,32.175 79.852,33.052 v1(80.2,33.4) ; v1(81.1,39.9) 81.1,39.371 81.571,38.9 86.7,38.9 v1(88.4,40.6) U5.20@88.4,41.85 ; v1(95.4,25.8) U4.20@95.4,27.05
  Bottom Layer w0.127: v1(80.2,33.4) 80.9,34.1 80.9,34.5 81.1,34.7 v1(81.1,39.9) ; v1(88.4,40.6) 88.5,40.5 88.5,32.7 v1(95.4,25.8)
BA1: U1.C8 U4.21 U5.21 | length 53.7
  Top Layer w0.127: U1.C8@67.03,27.216 67.03,26.97 67.4,26.6 67.4,26.25 67.65,26 68.721,26 68.968,26.247 68.968,26.268 70.145,27.444 70.584,27.444 71.145,26.884 72.525,26.884 72.839,27.199 77.38,27.199 77.634,27.453 79.053,27.453 79.907,28.306 79.907,29.5 79.9,29.506 79.9,31.863 80.106,32.07 80.106,32.447 81.5,33.841 v1(81.5,33.9) ; v1@81.7,39.393 81.793,39.3 86.3,39.3 v1(87.6,40.6) U5.21@87.6,41.85 ; v1(94.6,25.8) U4.21@94.6,27.05
  Bottom Layer w0.127: v1(81.5,33.9) 81.5,38.601 81.7,38.801 v1@81.7,39.393 ; v1(87.6,40.6) 87.7,40.5 87.7,32.7 v1(94.6,25.8)
  other v1: 81.7,39.4
CAS: U1.C3 U4.17 U5.17 | length 51.3
  Top Layer w0.127: U1.C3@67.03,31.216 v1@67.382,31.568 ; v1(72.4,38.8) 72.6,39 80,39 81.4,37.6 87.8,37.6 v1(90.8,40.6) U5.17@90.8,41.85 ; v1(97.8,25.8) U4.17@97.8,27.05
  Bottom Layer w0.127: v1(67.4,31.6) 67.8,32 69.326,32 71.447,34.122 71.447,35.276 71.716,35.545 71.945,35.545 72.046,35.646 72.046,36.846 72.4,37.2 v1(72.4,38.8) ; v1(90.8,40.6) 90.8,32.809 97.8,25.809 v1(97.8,25.8)
CKE: U1.G3 U4.37 U5.37 | length 57.3
  Top Layer w0.127: U1.G3@63.8,31.2 64.2,31.6 64.2,33 64,33.2 v1(64,35.1) ; v1(73.1,37.3) 73.23,37.43 76.294,37.43 76.484,37.621 76.916,37.621 77.236,37.3 79.766,37.3 81.566,35.5 86.1,35.5 90,31.6 U5.37@90,30.55 ; U5.37@89.97,30.144 89.97,29.6 87.8,27.43 87.8,26 97,16.8 U4.37@97,15.75
  Bottom Layer w0.127: v1(64,35.1) 65,36.1 67.3,36.1 71.398,40.198 72.002,40.198 73.1,39.1 v1(73.1,37.3)